# EAGLE board Hummingbird Necklace (EAGLE 7.1.0)
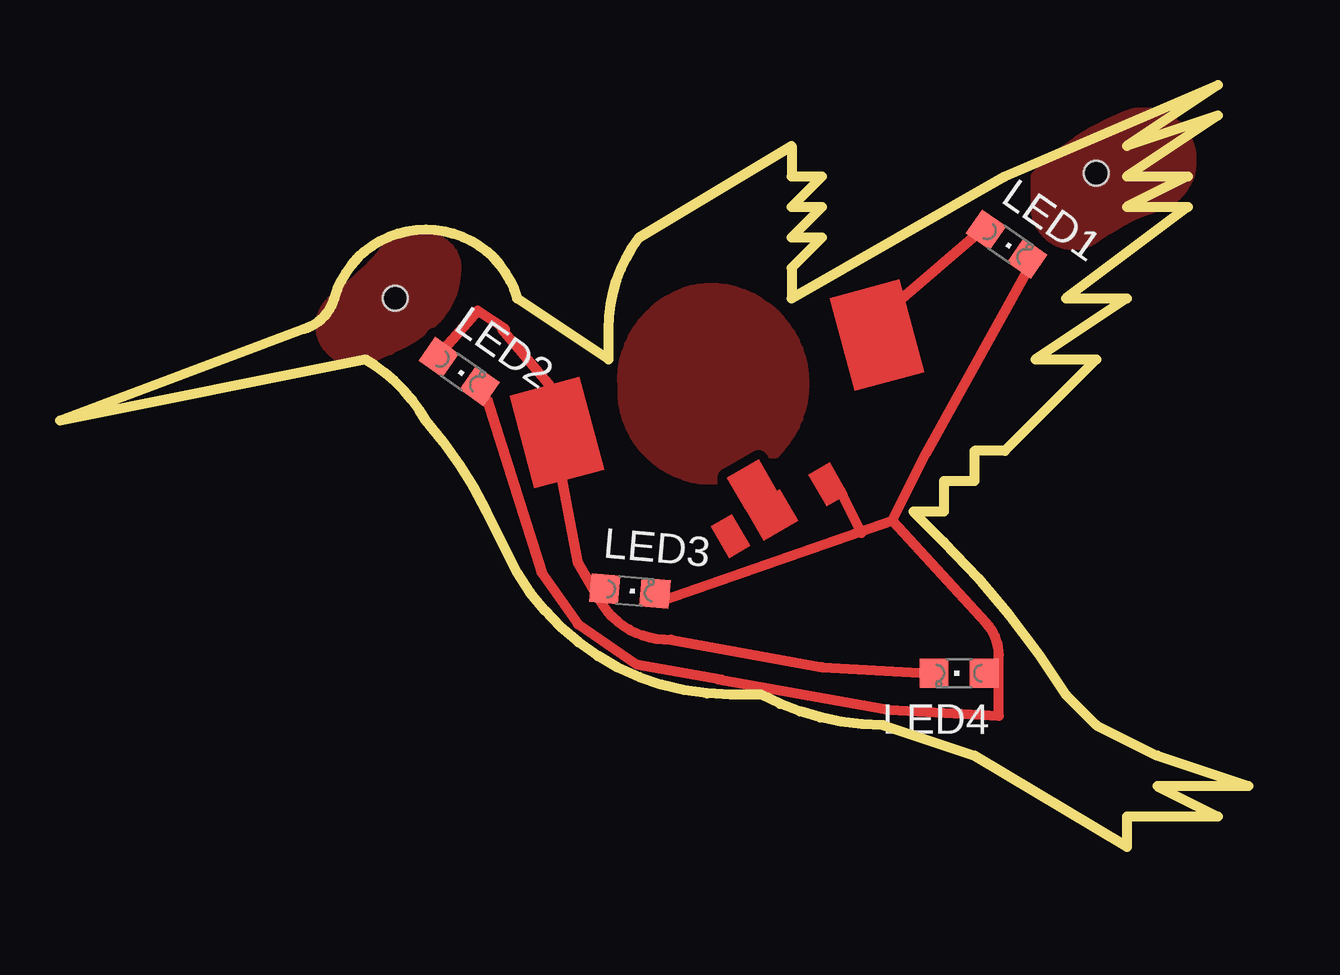
[diagram p0: board, top side]
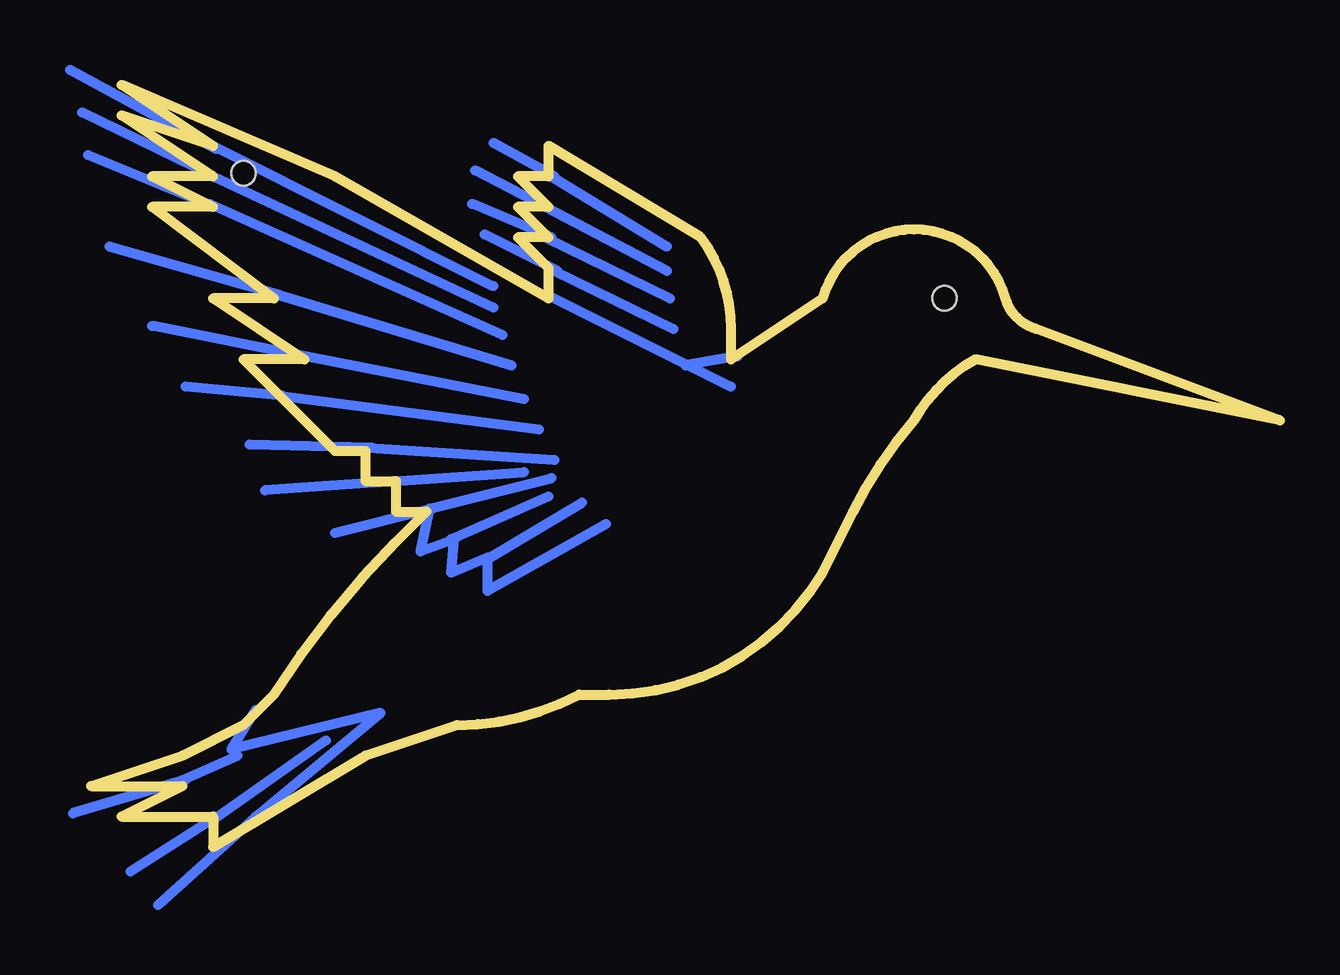
[diagram p1: board, bottom side, seen from below]

Size 49.53 x 31.75 mm. Coordinates in mm from the lower left corner, seen from the top.
Outline: 0,17.78 10.16,21.59 arc58 11.43,22.86 arc-148 19.05,22.86 22.86,20.32 22.86,21.59 arc-37 24.13,25.4 30.48,29.21 30.48,27.94 31.75,27.94 30.48,26.67 31.75,26.67 30.48,25.4 31.75,25.4 30.48,24.13 30.48,22.86 39.37,27.94 48.26,31.75 44.45,29.21 48.26,30.48 44.45,27.94 46.99,27.94 44.45,26.67 46.99,26.67 41.91,22.86 44.45,22.86 40.64,20.32 43.18,20.32 39.37,16.51 38.1,16.51 38.1,15.24 36.83,15.24 36.83,13.97 35.56,13.97 36.83,12.7 arc-13 41.91,6.35 43.18,5.08 45.72,3.81 49.53,2.54 45.72,2.54 48.26,1.27 44.45,1.27 44.45,0 38.1,3.81 34.29,5.08 arc-28 29.21,6.35 27.94,6.35 arc-59 19.05,11.43 17.78,13.97 arc14 15.24,17.78 arc31 12.7,20.32 0,17.78
Copper layers (1*16): Top 0.035mm / dielectric 1.5mm / Bottom 0.035mm
Design rules "OthermillDRC_1_64_v2": minimum track width 8mil, minimum drill 0.8mm, track to track 0.39878125mm, track to pad 0.39878125mm, pad to pad 0.39878125mm, via to via 0.39878125mm, smd to smd 0mil, copper to edge 0mil, drill to drill 1mil, minimum pad ring 10mil, minimum via ring 10mil, stop-mask expansion 1mil, vias tented up to drill 30mil, thermal gap 10mil
Holes 1.02 mm at 13.97,22.86 43.18,28.07

## Footprints (pad centres in the part's own frame; a part is rotated, then mirrored left to right if it is on the bottom)
CHIPLED_0805 = smd 1.2 x 1.2: A 0,-1.05; C 0,1.05

## Placement (x,y rotation side)
LED1  [CHIPLED_0805]  39.44,25.12 235 top
LED2  [CHIPLED_0805]  16.64,19.81 235 top
LED3  [CHIPLED_0805]  23.75,10.67 265 top
LED4  [CHIPLED_0805]  37.47,7.24 90 top

## Library data of the parts
LED1-LED4 = led

## Tracks (layer width: path | path; a pad name or v marks a point on that pad's centre or on a via)
N$8
  pour Top: 13.97,25.4 15.24,25.4 arc-90 16.51,24.13 arc-53 15.24,21.59 arc-21 12.7,20.32 arc-159 11.43,22.86 arc16
N$9
  pour Top: 40.64,27.94 40.64,26.67 arc127 43.18,25.4 arc-21 45.72,26.67 arc184 44.45,30.48 arc26
N$10
  Bottom 0.406: 30.48,22.99 22.86,19.18
N$11
  Bottom 0.406: 22.61,20.45 24.77,20.07
N$12
  Bottom 0.406: 42.67,5.71 43.69,4.06 37.47,5.59 42.67,1.27 46.74,-2.41
N$13
  Bottom 0.406: 44.45,1.14 39.75,4.45
N$14
  Bottom 0.406: 45.72,2.79 43.43,3.81
N$15
  Bottom 0.406: 30.35,27.94 25.53,25.02
N$16
  Bottom 0.406: 25.53,24 30.61,26.67 33.53,28.19
N$17
  Bottom 0.406: 30.61,25.4 25.4,22.86
N$18
  Bottom 0.406: 30.23,24 25.27,21.59
N$19
  Bottom 0.406: 44.45,29.21 32.77,23.37
N$20
  Bottom 0.406: 32.77,22.48 44.45,27.94 49.91,30.61
N$21
  Bottom 0.406: 44.58,26.8 32.38,21.34
N$22
  Bottom 0.406: 32,20.07 41.66,22.99 48.77,25.02
N$23
  Bottom 0.406: 40.51,20.45 31.5,18.67
N$24
  Bottom 0.406: 41.66,18.8 30.86,17.4
N$25
  Bottom 0.406: 37.97,16.64 30.23,16.13
N$26
  Bottom 0.406: 28.07,13.46 33.02,10.67 33.02,12.07 34.54,11.43 34.42,12.83 35.81,12.32 35.43,14.1 30.35,15.37
N$27
  Bottom 0.406: 32.89,12.07 29.08,14.35
N$28
  Bottom 0.406: 34.54,12.83 30.48,14.61
N$29
  Bottom 0.406: 36.96,15.24 31.5,15.62
N$30
  Bottom 0.406: 30.23,27.94 32.77,29.34
N$31
  Bottom 0.406: 30.35,25.4 33.66,26.8
N$32
  Bottom 0.406: 30.1,24 33.15,25.53
N$33
  Bottom 0.406: 44.32,29.08 50.42,32.39
N$34
  Bottom 0.406: 44.45,26.67 49.66,28.83
N$35
  Bottom 0.406: 40.64,20.45 46.99,21.72
N$36
  Bottom 0.406: 41.53,18.8 45.59,19.18
N$37
  Bottom 0.406: 37.85,16.64 42.93,16.76
N$38
  Bottom 0.406: 36.83,15.24 42.29,14.86
N$39
  Bottom 0.406: 35.31,14.1 39.37,13.08
N$40
  Bottom 0.406: 45.59,2.79 50.29,1.4
N$41
  Bottom 0.406: 44.32,1.27 47.88,-1.02
S$1
  pour Top: 31.04,19.3 arc90 27.04,23.3 arc90 23.42,19.18 arc90 27.04,15.3 arc90
S$2
  Top 0.406: 34.8,22.61 38.48,25.78
S$4
  Top 0.406: 40.51,24.38 36.07,16.38
S$6
  Top 0.406: 31.75,7.49 36.2,7.24
S$7
  Top 0.406: 20.57,19.05 18.41,21.59
S$8
  Top 0.406: 31.75,7.49 25.46,8.64 arc-63 22.47,10.31 21.59,11.81 20.7,16.51
S$9
  Top 0.406: 17.78,18.67 20.07,11.43 21.59,9.27 24,7.62 27.56,6.98
S$10
  Top 0.406: 18.54,21.59 17.4,22.35
S$11
  Top 0.406: 17.4,22.35 15.75,20.45
S$12
  Top 0.406: 27.43,6.98 34.54,5.71 39.12,5.46 39.12,7.99 arc43 38.59,9.33 34.67,13.59 | 34.67,13.59 36.07,16.38 | 25.15,10.29 34.67,13.59
S$14
  Top 0.406: 33.4,13.08 32.51,14.86
(copper drawn outside any net)
  shapes: Bottom circle x1, Top area x6